# Altium PCB CANDataDiodePCB-STM32F0-J1939-Rev7.PcbDoc
Units mil, origin at the board's own origin, x right, y up, seen from the top; angles counter-clockwise.
Board outline 2229 x 2270 mil, 2 copper layers (Component Side, Bottom Layer), stack 12.8 mil thick; 50 components, 52 nets, 263 pads, 96 vias.
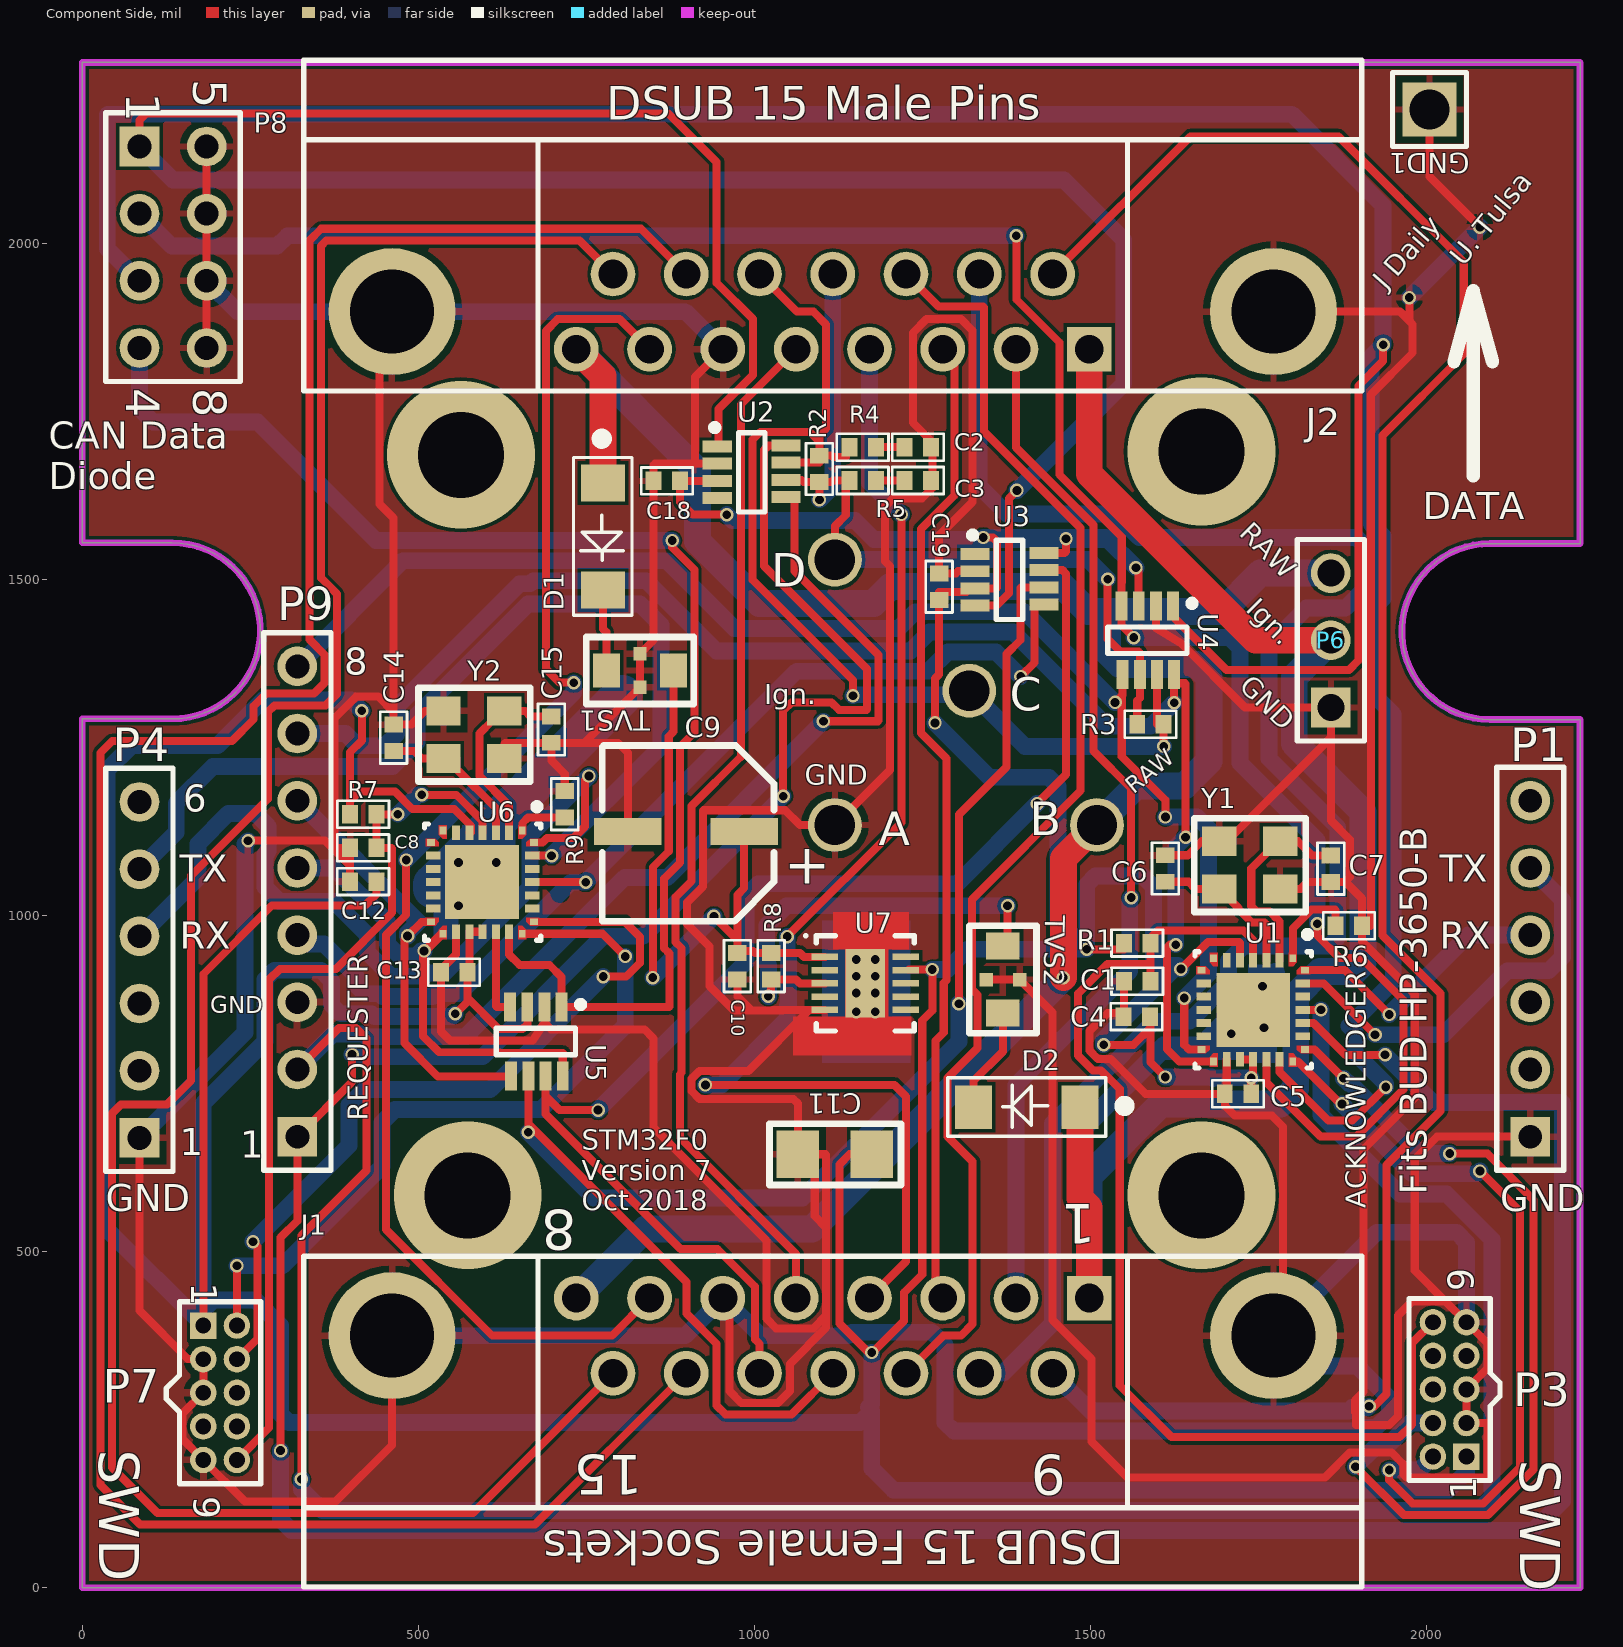
[diagram p0: Component Side view]
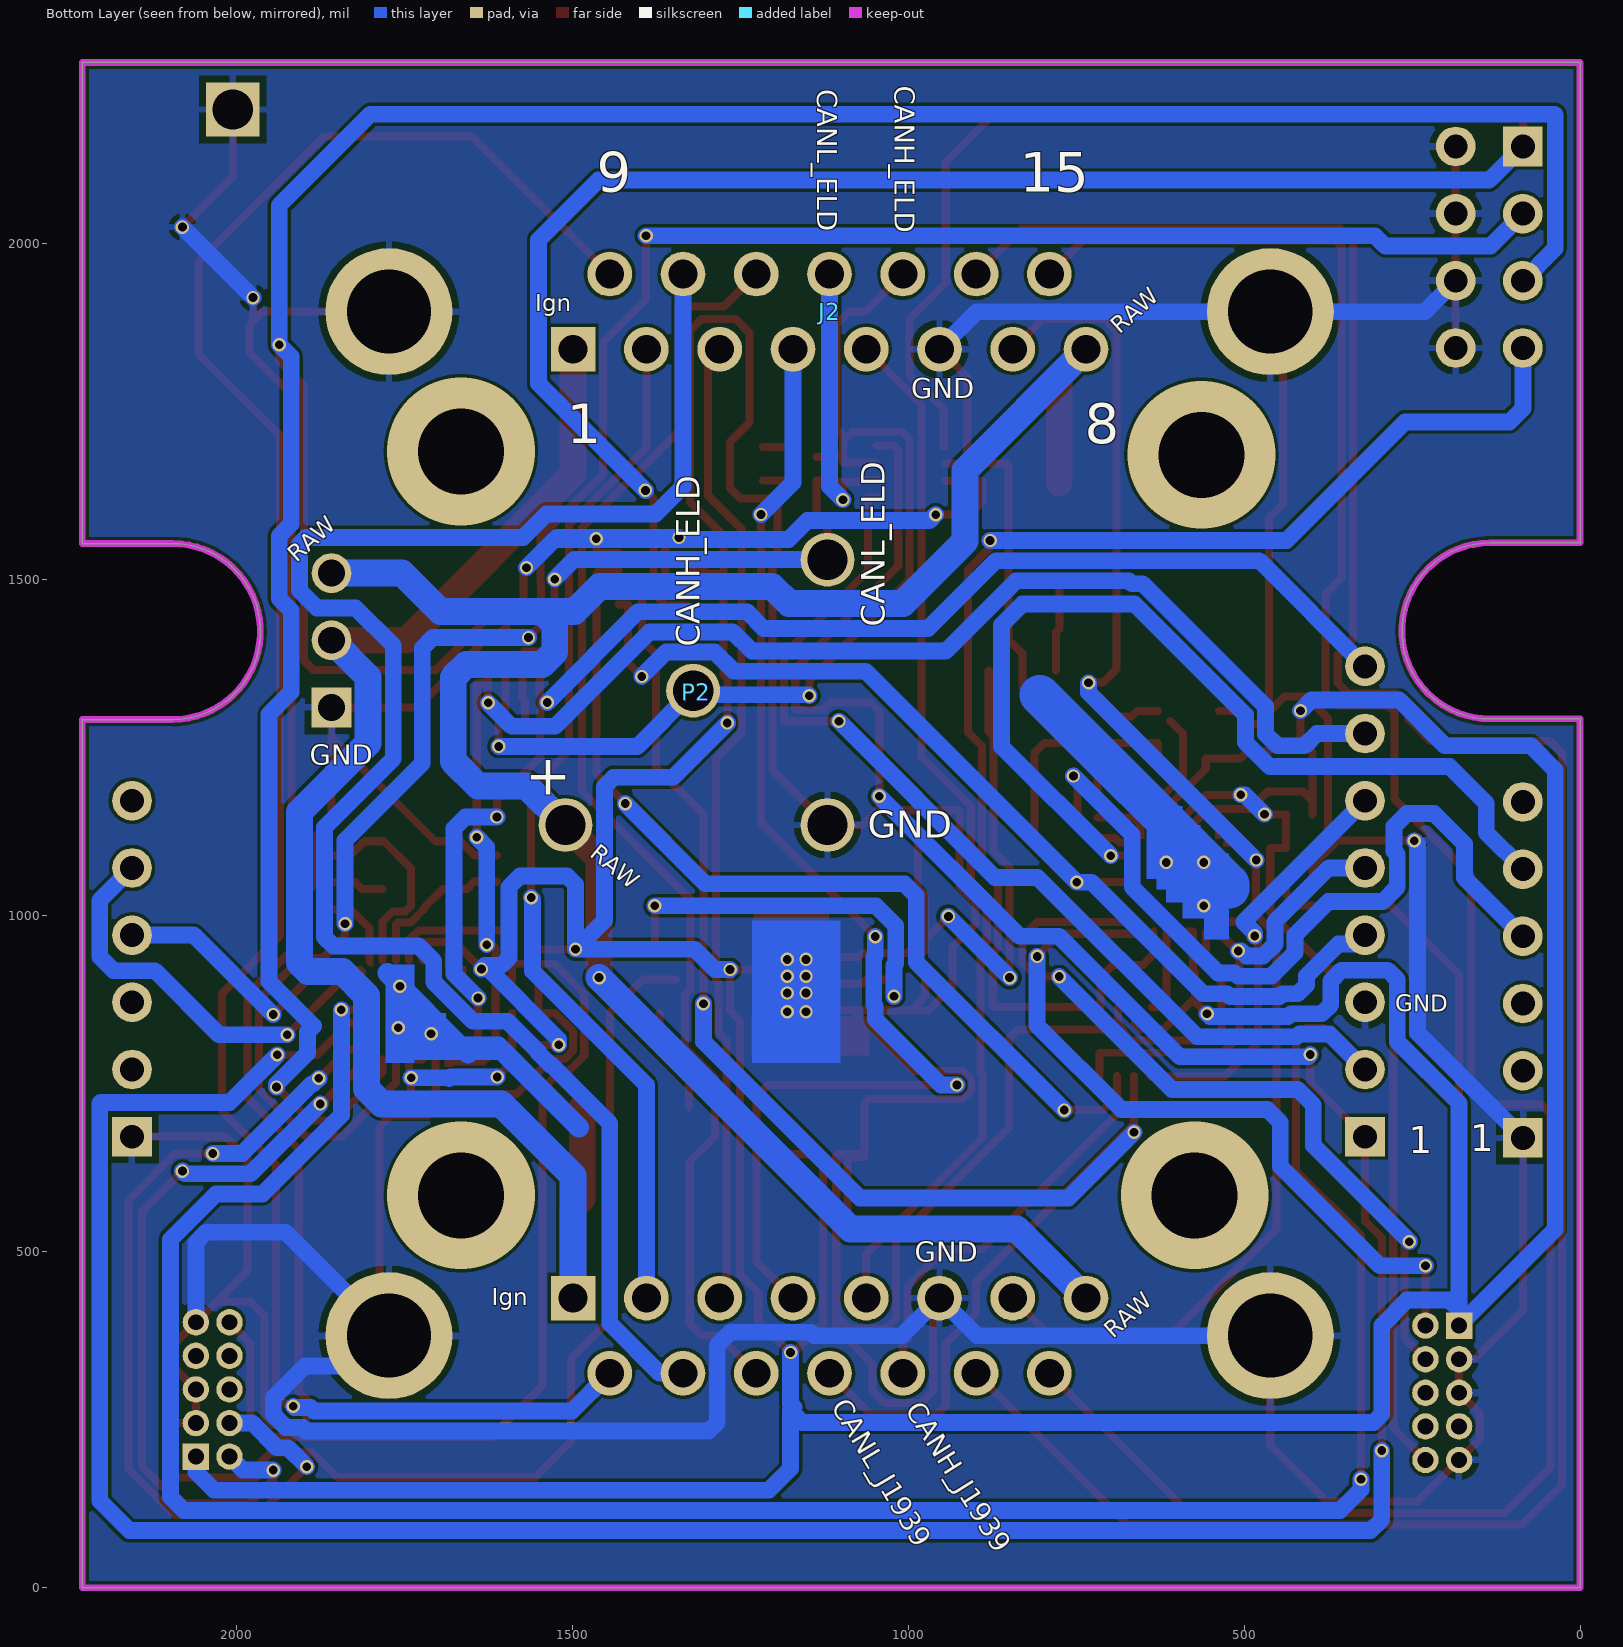
[diagram p1: Bottom Layer view, seen from below]

## Layer stack, top to bottom
Top Solder: solder mask 0.4, Solder Resist, Dk 3.5
Component Side: signal copper 1.4
Dielectric 1: core 10, FR-4, Dk 4.2
Bottom Layer: signal copper 1.4
Solder Side: solder mask 0.4, Solder Resist, Dk 3.5

## Board outline
0,0 0,1293 134,1293 ccw(c134,1424) 134,1555 0,1555 0,2270 2229,2270 2229,1554 2095,1554 ccw(c2095,1423) 2095,1292 2229,1292 2229,0

## Design rules (kind name [scope] priority, off if disabled: settings)
Clearance [All] p1: gap=5 ignorepadtopadclearanceinfootprint=FALSE
HoleSize [All] p1: absolutevalues=TRUE maxlimit=200 minlimit=13 maxpercent=80.000 minpercent=20.000
HoleToHoleClearance [All] p1: gap=10 allowstackedmicrovias=FALSE
MinimumSolderMaskSliver [All] p1: minsoldermaskwidth=1
PolygonConnect [All] p1: connectstyle=Relief reliefconductorwidth=10 reliefentries=4 polygonreliefangle="90 Angle" airgapwidth=10
RoutingVias [All] p1: holewidth=13 width=20 viastyle="Through Hole" minholewidth=13 minwidth=15 maxholewidth=28 maxwidth=50
SMDNeckDown [All] p1: percent=200.000
SilkToSilkClearance [All] p1: silktosilkclearance=1
SilkToSolderMaskClearance [IsPad] p1: minsilkscreentomaskgap=1 clearancetoexposedcopper=TRUE
SolderMaskExpansion [All] p1: expansion=4
Width Large [InNet('RAW') or InNet('Ignition_RAW')] p1: maxlimit=100 minlimit=40 preferedwidth=40 minimp=50.000000 maximp=50.000000 favimp=50.000000
Width [(InComponent('U1')  Or InComponent('U7')) And OnTopLayer] p2: maxlimit=100 minlimit=7 preferedwidth=25 toplayer_prefwidth=12 bottomlayer_minwidth=10 minimp=50.000000 maximp=50.000000 favimp=50.000000
Width Width_1 [All] p3: maxlimit=100 minlimit=7 preferedwidth=25 toplayer_prefwidth=12 bottomlayer_minwidth=10 minimp=50.000000 maximp=50.000000 favimp=50.000000
25 further rules are at their usual default settings.

## Components (designator, comment, footprint, x,y, rotation, side; value= is the part's Value field where it differs from the comment)
C1 "0.1uF" 0402 1570,902.5 r0 top
C2 "560pF" 0402 1243.57,1697.18 r180 top
C3 "560pF" 0402 1243.57,1647.8 r180 top
C4 "0.1uF" 0402 1569.09,850 r0 top
C5 "0.1uF" 0402 1720,735 r0 top
C6 "18pF" 0402 1612.02,1070.31 r270 top
C7 "18pF" 0402 1858.2,1070 r270 top
C8 "0.1uF" 0402 417.98,1100.94 r0 top
C9 "47uF" "Elec. Cap - D" 898.39,1125.59 r0 top
C10 "0.1uF" 0402 975,924.96 r90 top
C11 "22uF" 1206 1120,645 r0 top
C12 "0.1uF" 0402 417.98,1050.94 r0 top
C13 "0.1uF" 0402 553.3,915.94 r0 top
C14 "18pF" 0402 463.14,1265 r270 top
C15 "18pF" 0402 698.14,1277.11 r270 top
C18 "0.1uF" 0402 870,1647.2 r0 top
C19 "0.1uF" 0402 1275,1489.69 r270 top
D1 "ACURA107-HF" "SMA with A and K" 775,1644 r270 top
D2 "ACURA107-HF" "SMA with A and K" 1485,715 r180 top
GND1 "Socket" PIN1 2005,2200 r0 top
J1 "Vehicle Interface Cable Connector (Female)" DSUB1.385-2H15 1116.89,0.98 r180 top
J2 "Device (ELD) Interface Cable Connector (male)" DSUB1.385-2H15 1116.89,2273.11 r180 bottom locked
P1 "Header 6" HDR1X6 2155,671.18 r90 top
P2 "Deutsch 9-pin" HDR1X5 1925,1620 r270 bottom locked
P3 "JTAG/SWD" MHDR2X5 2060,195 r90 top
P4 "Header 6" HDR1X6 85,669.41 r90 top
P6 "Header 3" HDR1X3 1858.2,1310 r90 top
P7 "JTAG/SWD" MHDR2X5 180,390 r270 top
P8 "Saleae Header" HDR2X4_CEN 85,2145 r270 top
P9 "Testpoint Header" HDR1X8 320,671.18 r90 top
R1 "10k" 0402 1570,959.27 r180 top
R2 "120" 0402 1096.97,1665 r90 top
R3 "120" 0402 1589.69,1285 r0 top
R4 "120" 0402 1161.43,1697.18 r0 top
R5 "120" 0402 1161.43,1647.8 r0 top
R6 "10k" 0402 1885.02,985 r180 top
R7 "10k" 0402 417.98,1150.94 r180 top
R8 "120" 0402 1025,924.96 r270 top
R9 "10k" 0402 717.98,1165.94 r270 top
TVS1 "Transfeed Varistor 26V" Transfeed 780,1365 r0 top
TVS2 "Transfeed Varistor 26V" Transfeed 1370,855 r90 top
U1 "STM32F042G4U6" STM-UFQFPN28_V 1742.61,860 r270 top
U2 "TCAN330DCNT" SOT65P280X145-8N 996.18,1660 r0 top
U3 "TCAN330DCNT" SOT65P280X145-8N 1380,1500 r0 top
U4 "TCAN334DCNT" SOT65P280X145-8N 1585,1410 r270 top
U5 "TCAN334DCNT" SOT65P280X145-8N 675,812.89 r270 top
U6 "STM32F042G4U6" STM-UFQFPN28_V 595.74,1050 r270 top
U7 "TLS810B1LDV33XUMA1" SON50P330X110_HS-11N 1165.24,899.37 r0 top
Y1 "20MHz" "XTAL 4 pad" 1692.06,1040 r0 top
Y2 "20MHz" "XTAL 4 pad" 537.59,1234.13 r0 top

## Footprints (in the part's own frame and the unit in brackets; to place one, negate y for a bottom-side part, rotate by r counter-clockwise, add the part's x,y. Pads: shape width x height; smd on the part's side, far side on the other; paste and mask are expansions set on the pad)
0402 [mm] "Chip Capacitor, Body 1.0x0.5mm, IPC High Density"
  rect 0.6x0.7 smd: 1(-0.5,0) 2(0.5,0)
  silkscreen extent -0.97,-0.51 0.97,0.51, body extent -0.55,-0.3 0.55,0.3, height 1.3
1206 [mm]
  rect 1.6x1.8 smd: 1(-1.4,0) 2(1.4,0)
  silkscreen extent -2.47,-1.16 2.5,1.15
DSUB1.385-2H15 [mm] "Connector; D Subminiature; 15 Position; Right Angle; Pitch 1.385 mm"
  rect 1.69x1.69 hole 1.09: 1(-9.695,-10.92)
  round 1.69 hole 1.09: 2(-6.925,-10.92) 3(-4.155,-10.92) 4(-1.385,-10.92) 5(1.385,-10.92) 6(4.155,-10.92) 7(6.925,-10.92) 8(9.695,-10.92) 9(-8.31,-8.08) 10(-5.54,-8.08) 11(-2.77,-8.08) 12(0,-8.08) 13(2.77,-8.08) 14(5.54,-8.08) 15(8.31,-8.08)
  round 4.8 hole 3.18: 16(-16.66,-9.5) 17(16.66,-9.5)
  silkscreen extent -20,-12.5 20,0
"Elec. Cap - D" [mil] "Panasonic Style Electrolytic capacitor, Can size D, 6.3mm diameter"
  rect 100x40 smd: 1(86.61,0) 2(-86.61,0)
  silkscreen extent -125,-134 131,128
HDR1X3 [mm] "Connector; Header; 3 Position"
  rect 1.5x1.5 hole 1.016: 1(0,0)
  round 1.5 hole 1.016: 2(2.54,0) 3(5.08,0)
  silkscreen extent -1.27,-1.27 6.35,1.27
HDR1X5 [mil] "Connector; Header; 5 Position"
  round 80 hole 60: 2(485,415) 3(285,605) 4(90,805) 5(485,805)
HDR1X6 [mm] "Connector; Header; 6 Position"
  rect 1.5x1.5 hole 0.9: 1(0,0)
  round 1.5 hole 0.9: 2(2.54,0) 3(5.08,0) 4(7.62,0) 5(10.16,0) 6(12.7,0)
  silkscreen extent -1.27,-1.27 13.97,1.27
HDR1X8 [mm] "Connector; Header; 8 Position"
  rect 1.5x1.5 hole 0.9: 1(0,0)
  round 1.5 hole 0.9: 2(2.54,0) 3(5.08,0) 4(7.62,0) 5(10.16,0) 6(12.7,0) 7(15.24,0) 8(17.78,0)
  silkscreen extent -1.27,-1.27 19.05,1.27
HDR2X4_CEN [mm] "Connector; Header; 4x2 Position"
  rect 1.5x1.5 hole 0.9: 1(0,0)
  round 1.5 hole 0.9: 2(2.54,0) 3(5.08,0) 4(7.62,0) 5(0,2.54) 6(2.54,2.54) 7(5.08,2.54) 8(7.62,2.54)
  silkscreen extent -1.27,-1.27 8.89,3.81
MHDR2X5 [mm] "Connector; Header; 5x2 Position"
  rect 1x1 hole 0.6: 1(0,0)
  round 1 hole 0.6: 2(0,1.27) 3(1.27,0) 4(1.27,1.27) 5(2.54,0) 6(2.54,1.27) 7(3.81,0) 8(3.81,1.27) 9(5.08,0) 10(5.08,1.27)
  silkscreen extent -0.9,-1.27 5.98,2.17
PIN1 [mil] "Connector; Plug"
  rect 80x80 hole 60: 1(0,0)
  silkscreen extent -55,-55 55,55
"SMA with A and K" [mil] "SMA with outline and Cathode Bar on Pin 2"
  rect 55x65 smd: 1(0,0) 2(159,0)
  silkscreen extent -71,-44 197,43
SON50P330X110_HS-11N [mm] "SON, 10-Leads, Body 3.25x3.30mm, Pitch 0.50mm, Thermal Pad 2.58x1.48mm, IPC Medium Density"
  rect 1x0.25 smd: 1(-1.53,1) 2(-1.53,0.5) 3(-1.53,0) 4(-1.53,-0.5) 5(-1.53,-1) 6(1.53,-1) 7(1.53,-0.5) 8(1.53,0) 9(1.53,0.5) 10(1.53,1)
  rect 1.48x2.58 smd: 11(0,0)
  silkscreen extent -2.3,-1.8 1.85,1.85, body extent -1.7,-1.65 1.7,1.65, height 1.1
SOT65P280X145-8N [mm] "SOT23, 8-Leads, Body 2.90x2.80mm, Pitch 0.65mm, IPC Medium Density"
  rect 1.1x0.45 smd: 1(-1.3,0.975) 2(-1.3,0.325) 3(-1.3,-0.325) 4(-1.3,-0.975) 5(1.3,-0.934) 6(1.3,-0.284) 7(1.3,0.366) 8(1.3,1.016)
  silkscreen extent -1.52,-1.5 0.5,1.81, body extent -1.3,-1.5 1.3,1.5, height 1.45
STM-UFQFPN28_V [mm] "QFN, 28-Leads, Body 4.1x4.1mm, Pitch 0.5mm"
  rect 0.3x0.25 smd: 1(-1.95,1.5) 7(-1.95,-1.5) 15(1.95,-1.5) 21(1.95,1.5)
  rect 0.55x0.3 smd: 2(-1.875,1) 3(-1.875,0.5) 4(-1.875,0) 5(-1.875,-0.5) 6(-1.875,-1) 16(1.875,-1) 17(1.875,-0.5) 18(1.875,0) 19(1.875,0.5) 20(1.875,1)
  rect 0.25x0.3 smd: 8(-1.5,-1.95) 14(1.5,-1.95) 22(1.5,1.95) 28(-1.5,1.95)
  rect 0.3x0.55 smd: 9(-1,-1.875) 10(-0.5,-1.875) 11(0,-1.875) 12(0.5,-1.875) 13(1,-1.875) 23(1,1.875) 24(0.5,1.875) 25(0,1.875) 26(-0.5,1.875) 27(-1,1.875)
  Component Side region: 1.35,2.15 1.35,1.65 1.505,1.65 1.65,1.795 1.65,2.15
  Component Side region: 2.15,-1.35 1.65,-1.35 1.65,-1.505 1.795,-1.65 2.15,-1.65
  Component Side region: -2.15,1.35 -1.65,1.35 -1.65,1.505 -1.795,1.65 -2.15,1.65
  Component Side region: 2.15,1.35 1.65,1.35 1.65,1.505 1.795,1.65 2.15,1.65
  Component Side region: 1.35,-2.15 1.35,-1.65 1.505,-1.65 1.65,-1.795 1.65,-2.15
  Component Side region: -1.35,2.15 -1.35,1.65 -1.505,1.65 -1.65,1.795 -1.65,2.15
  Component Side region: -1.35,-2.15 -1.35,-1.65 -1.505,-1.65 -1.65,-1.795 -1.65,-2.15
  Component Side region: -2.15,-1.35 -1.65,-1.35 -1.65,-1.505 -1.795,-1.65 -2.15,-1.65
  silkscreen extent -2.97,-2.2 2.2,2.2, body extent -2.05,-2.05 2.05,2.05, height 0.6
Transfeed [mil] "AVX Multilayer Ceramic Transient Voltage Suppressors"
  rect 40x50 smd: 1(0,0) 2(100,0)
  rect 20x20 smd: 3(50,-25) 3(50,25)
  silkscreen extent -30,-50 130,50
"XTAL 4 pad" [mm] "16MHz ±30ppm Crystal 18pF 80 Ohms 4-SMD, No Lead XTAL 4 pad ECS Inc.  ECS-160-18-33Q-DS"
  rect 1.3x1.1 smd: 1(0,0) 2(2.3,0) 3(2.3,1.8) 4(0,1.8)
  silkscreen extent -0.95,-0.87 3.27,2.67

## Part data
C1 C4 C5 C8 C10 C12 C13 C18 C19: library part Cap, "0.1µF ±10% 50V Ceramic Capacitor X7R 0402 (1005 Metric)", Manufacturer="TDK Corporation", PartNumber=CGA2B3X7R1H104K050BB, Supplier Part Number 1=445-6899-1-ND, Supplier 1=Digi-Key
C2 C3: library part Cap, "560pF ±5% 50V Ceramic Capacitor CH 0402 (1005 Metric)", Manufacturer="Taiyo Yuden", PartNumber=06031C561K4T2A, Supplier Part Number 1=587-5093-1-ND, Supplier 1=Digi-Key
C6 C7 C14 C15: library part Cap, "18pF ±5% 50V Ceramic Capacitor C0G, NP0 0402 (1005 Metric)", Manufacturer="Murata Electronics North America", PartNumber=GCM1555C1H180JA16D, Supplier Part Number 1=490-12650-1-ND, Supplier 1=Digi-Key
C9: library part "Electrolytic Cap", "47µF 35V Aluminum Capacitors Radial, Can - SMD 5000 Hrs @ 105°C", Manufacturer="Panasonic Electronic Components", PartNumber=EEE-HDV470XAP, Supplier Part Number 1=PCE4968CT-ND, Supplier 1=Digi-Key
C11: library part Cap, "22µF ±20% 4V Ceramic Capacitor X7R 1206 (3216 Metric)", Manufacturer="Taiyo Yuden", PartNumber=AMK316AB7226MLHT, Supplier Part Number 1=587-3267-1-ND, Supplier 1=Digi-Key
D1 D2: library part "Schottky Diode", "Diode Schottky 1000V 1A Surface Mount DO-214AC (SMA)", Manufacturer="Comchip Technology", Supplier Part Number 1=641-1884-1-ND, PartNumber=ACURA107-HF, Supplier 1=Digi-Key
J1: library part "D Connector 15", "Receptacle Assembly, 15 Position, Right Angle", Manufacturer="Amphenol FCI", PartNumber=D15S33E4GV00LF, Supplier Part Number 1=609-1498-ND, Supplier 1=Digi-Key
J2: library part "D Connector 15", "Receptacle Assembly, 15 Position, Right Angle", Manufacturer="Amphenol FCI", PartNumber=D15P33E4GV00LF, Supplier Part Number 1=609-1492-ND, Supplier 1=Digi-Key
P1 P4: "Header, 6-Pin", Manufacturer="Sullins Connector Solutions", PartNumber=PBC06SFAN, Supplier Part Number 1=S1211E-06-ND, Supplier 1=Digi-Key
P2: library part "Header 5", "Pins A,B C, D oin the J1939 connector"
P3: library part MHDR2X5, "Connector Header Through Hole 10 position 0.050\" (1.27mm)", Manufacturer="CNC Tech", PartNumber=1175-1627-ND, Supplier 1=Digi-Key, Supplier Part Number 1=1175-1627-ND
P6: "Header, 3-Pin"
P7: library part MHDR2X5, "Header, 5-Pin, Dual row", Manufacturer="CNC Tech", PartNumber=1175-1627-ND, Supplier 1=Digi-Key, Supplier Part Number 1=1175-1627-ND
P8: library part "Header 4X2A", "Header, 4-Pin, Dual row", LatestRevisionDate=17-Jul-2002, LatestRevisionNote="Re-released for DXP Platform.", Publisher="Altium Limited"
P9: library part "Header 8", "Header, 8-Pin", LatestRevisionDate=17-Jul-2002, LatestRevisionNote="Re-released for DXP Platform.", Publisher="Altium Limited"
R1 R6 R7 R9: library part "Chip Resistor", "10 kOhms ±0.5% 0.063W, 1/16W Chip Resistor 0402 (1005 Metric) Anti-Sulfur, Automotive AEC-Q200 Thin Film", Manufacturer=Susumu, PartNumber=RG1005P-103-D-T10, Supplier Part Number 1=RG10P10.0KDCT-ND, Supplier 1=Digi-Key
R2 R3 R4 R5 R8: library part "Chip Resistor", "120 Ohms ±1% 0.063W, 1/16W Chip Resistor 0402 (1005 Metric) Automotive AEC-Q200 Thick Film", Manufacturer="Vishay Dale", PartNumber=CRCW0402120RFKED, Supplier Part Number 1=541-120LCT-ND, Supplier 1=Digi-Key
TVS1 TVS2: library part Transfeed, "34.5V 80A Varistor 1 Circuit Surface Mount 0805 (2012 Metric)", Manufacturer=AVX, PartNumber=V2AF126C600Y2EDP, Supplier Part Number 1=478-10038-1-ND, Supplier 1=Digi-Key
U1 U6: library part STM32F050G4U6, "ARM® Cortex®-M0 STM32F0 Microcontroller IC 32-Bit 48MHz 16KB (16K x 8) FLASH 28-UFQFPN (4x4)", Manufacturer=STMicroelectronics, Supplier Part Number 1=497-13619-ND, PartNumber=STM32F050G4U6, Supplier 1=Digi-Key
U2 U3: library part SN65HVD234DR, "IC TXRX CAN 3.3V SOT23-8", Manufacturer="Texas Instruments", Supplier Part Number 1=296-44210-1-ND, PartNumber=TCAN330DCNT, Supplier 1=Digi-Key
U4 U5: library part SN65HVD234DR, "IC TXRX CAN 3.3V SOT23-8", Manufacturer="Texas Instruments", Supplier Part Number 1=296-44503-1-ND, PartNumber=TCAN334DCNT, Supplier 1=Digi-Key
U7: library part TLS810B1, "Linear Voltage Regulator IC  1 Output  100mA PG-TSON-10", Manufacturer="Infineon Technologies", Supplier Part Number 1=TLS810B1LDV33XUMA1CT-ND, PartNumber=TLS810B1LDV33XUMA1, Supplier 1=Digi-Key
Y1 Y2: library part "Crystal with Ground", "20MHz ±30ppm Crystal 18pF 60 Ohms 4-SMD, No Lead", Manufacturer="ECS Inc.", PartNumber=ECS-200-18-33Q-DS, Supplier Part Number 1=XC1998CT-ND, Supplier 1=Digi-Key

## Free pads (board coordinates)
  rect 110x110 smd: 0(595,1050) 0(1742.61,860)

## Via types
v1: diameter 20, hole 13, Component Side to Bottom Layer, 92 vias
v2: diameter 220, hole 128, Component Side to Bottom Layer, 4 vias

## Nets (pads, with @x,y where several pads share a name; then routed paths per layer and width w, separated by ;. In a path a pad name is that pad's centre, name@x,y a point inside that pad or via, vN(x,y) a via of type N, cw(c..) or ccw(c..) an arc to the next point about the centre after c; other vN are vias at no path point)
3V3: C4.2 C5.2 C11.2 C12.2 C13.2 C18.2 C19.2 P3.1 P7.1 R1.2 R7.2 U1.5 U1.17 U1.18 U2.3 U3.3 U3.8 U4.3 U5.3 U6.5 U6.17 U6.18 U7.9 | length 10404.4
  Component Side w12: P7.1 180,913 282,1015 420.61,1015 437.67,1032.06 C12.2 ; R7.2 398.3,1171 ; v1(416,1305) 416,1261 398.3,1243.3 398.3,1171 ; v1(555,854) 572.98,871.98 572.98,878.02 ; U6.5 578.74,1123.82 578.74,1133.74 553.47,1159 491.09,1159 465.09,1185 412.3,1185 398.3,1171 ; U6.18 U6.17 576.05,915.94 C13.2 572.98,878.02 ; U5.3 662.2,838.62 655,831.42 619.58,831.42 572.98,878.02 ; U2.3 C18.2 889.69,1615.81 908.5,1597 v1(959,1597) ; C11.2 1142,645 1127,630 1127,393 1170,350 v1(1175,350) 1175,351 1176,350 1223,397 1223,439 1250,466 1250,844 1265,859 1265,915.04 1260.04,920 U7.9@1230.53,920 ; v1(1269,1287) 1269,1353 1275,1359 C19.2 1275,1482 1316,1482 1316,1487.2 U3.3 1360,1487.2 1361.47,1488.68 1361.47,1557 1355.47,1563 v1(1341,1563) ; U3.8 1462,1540 1464,1542 v1(1464,1561) ; v1(1495,950) R1.2@1550.32,950 ; v1(1520,807.94) 1564.63,807.94 1589.69,833 ; v1(1568,1518) 1572.21,1513.79 U4.3 ; C4.2@1589.69,855 1589.69,833 ; v1(1611.69,760) 1589.69,782 1589.69,833 ; v1(1635,920.68) 1669.97,955.65 ; v1@1640,926 1669.65,955.65 1669.97,955.65 ; U1.17 U1.18 1742.61,761.93 v1(1739.69,759) C5.2 ; U1.5 1722.93,959.45 1721.38,961 1675.32,961 1669.97,955.65
  Bottom Layer w25: v1(416,1305) 400,1321 269,1321 201,1253 73,1253 37,1217 37,533 P7.1 180,413 ; v1(555,854) 551,850 434.4,850 430.4,854 384.5,854 371,867.5 371,903 355,919 286,919 272,905 272,813 180,721 180,413 ; v1(959,1597) 967.79,1588.21 1149.79,1588.21 1178,1560 1526,1560 ; v1(1175,350) 1175,273.5 1170,268.5 1175,263.5 ; v1(1265,920) 1287.42,920 1317.42,950 v1(1495,950) ; v1(1269,1287) 1350,1206 1438.5,1206 1452,1192.5 1452,993 v1(1495,950) ; v1(1341,1563) 1523,1563 1525,1561 ; v1(1464,1561) 1525,1561 ; v1(1520,807.94) 1520,816 v1@1629.98,925.98 ; v1(1568,1518) 1526,1560 ; v1(1611.69,760) 1681,760 1683,758 1684,759 v1(1739.69,759) ; v1(1635,920.68) 1635,920.95 v1@1629.98,925.98 ; P3.1 2060,172 2033,145 1207,145 1175,177 1175,263.5 ; 180,413 195,428 257.5,428 295,390.5 295,258.5 307.5,246 1157.5,246 1175,263.5 ; v1(1495,950) 1495,1046.5 1507.5,1059 1577.5,1059 1594,1042.5 1594,937.5 1605.5,926 v1@1630,926 ; 1525,1561 1526,1560
12V0: C9.1 C10.2 R8.1 TVS1.2 U7.1 | length 963.8
  Component Side w12: v1(849,908) 849,1072.23 872.77,1096 872.77,1267 880,1274.23 TVS1.2 ; v1(940,999) 975,964 ; C9.1 985,1041 975,1031 975,964 ; U7.1 1073.81,938.74 1067.91,944.65 R8.1 1000.95,944.65 998,947.6 975,947.6 975,964
  Bottom Layer w25: v1(849,908) v1(940,999)
A7: J1.11 J2.11 | length 1942.5
  Component Side w12: J1.11 1281.85,375 1307.5,375 1325,392.5 1325,634 1287.5,671.5 1287.5,758.5 1332.08,803.08 1332.08,882.36 1324,890.44 1324,1024.44 1485.65,1186.09 1485.65,1576.88 1341.74,1720.79 1341.74,1905.27 1340.15,1906.86 1274.09,1906.86 J2.11
ACK_CAN_RX: P8.2 U1.19 U4.4 | length 3243.3
  Component Side w12: v1(1390,2012) 1390,1917.5 1454,1853.5 1454,1656.61 1547,1563.61 1547,1496.5 1546.61,1496.11 U4.4 1546.61,1432.39 v1(1565,1414) ; U1.19 1762.3,752 1842.8,671.5 1896.2,671.5 1966,741.3 1966,874.63 1903.42,937.21 1871.08,937.21 1838,970.29 v1(1838,988)
  Bottom Layer w25: P8.2 133,1997 290,1997 305,2012 v1(1390,2012) ; v1(1565,1414) 1707.5,1414 1723,1398.5 1723,1227.01 1838,1112.01 v1(1838,988)
ACK_CAN_TX: P8.3 U1.20 U4.1 | length 4663.2
  Component Side w12: U4.1 1623.39,1445.61 1703,1366 1885,1366 1899,1380 1899,1788.5 1936,1825.5 v1(1936,1850) ; U1.20 1781.98,767.5 1854.48,695 1890,695 v1(1940,745)
  Bottom Layer w25: P8.3 37,1993 37,2192 38,2193 1800,2193 1936,2057 v1(1936,1850) 1918.16,1832.16 1918.16,1583.27 1936,1565.43 1936,1471.96 1918.16,1454.11 1918.16,1332.84 1951,1300 1951,902.13 1885,836.13 1894,827.13 1894,795.48 1940,749.48 v1(1940,745)
ACK_NRST: C1.2 P3.10 R1.1 U1.4 | length 1639.3
  Component Side w12: C1.2 1589.69,929 ; U1.4 1742.61,963.8 1728.42,978 1600.69,978 1589.69,967 1589.69,950 1589.69,929 ; P3.10 1979,364 1979,242.5 1960.5,224 1621,224 1544,301 1544,742 1516.06,769.94 1504.26,769.94 1482,792.2 1482,884 1526,928 1589.69,929
ACK_OSC_IN: C7.1 U1.2 Y1.3 | length 309.1
  Component Side w12: U1.2 1781.98,991.36 1766.69,1006.65 1747.85,1006.65 1739.69,1014.81 1739.69,1070.19 1780.37,1110.87 Y1.3 1809,1110.87 1830.18,1089.69 C7.1
ACK_OSC_OUT: C6.2 U1.3 Y1.1 | length 230.8
  Component Side w12: C6.2 1646,1050.63 1656.63,1040 Y1.1 1720.78,1011.28 1720.78,1009.68 1740.81,989.65 1759.65,989.65 1762.3,987 U1.3
ACK_SHDN: P9.8 U1.14 U4.5 | length 2080.4
  Component Side w12: v1(1537,1317.5) 1547,1327.5 ; U4.5 1548.23,1328.73 1547,1327.5 ; v1(1612,1147) 1612,1172 1547,1237 1547,1327.5 ; v1(1640,877.5) 1640,807.94 1647,800.94 U1.14
  Bottom Layer w25: P9.8 477.32,1528.5 869.35,1528.5 970.35,1427.5 1215,1427.5 1240,1452.5 1402,1452.5 v1(1537,1317.5) ; v1(1612,1147) 1659,1147 1676,1130 1676,913.5 v1(1640,877.5)
ACK_STB: P9.7 U1.15 U4.8 | length 2262
  Component Side w12: v1(1625,1317) U4.8@1625,1346 ; U4.8 U4.8@1625,1346 ; v1(1627.21,957) 1619,957 1614,952 1614,801.73 1632.5,783.23 U1.15 ; v1(1642,1117) 1642,1345 1641,1346 U4.8@1625,1346
  Bottom Layer w25: P9.7 391.49,1271.18 409.67,1253 450.43,1253 468,1270.57 468,1311.33 650.67,1494 666.57,1494 671.07,1498.5 839.35,1498.5 943.85,1394 1232.5,1394 1261,1422.5 1385,1422.5 1525.5,1282 1590,1282 v1(1625,1317) ; v1(1627.21,957) 1627.21,1102.21 v1(1642,1117)
ACK_SWCLK: P3.4 U1.22 | length 1299.3
  Component Side w12: U1.22 1834.06,800.94 v1(1877,758) ; v1(1895,180) 1967,108 2092.04,108 2160,175.96 2160,577 2091,646 v1(2035,646)
  Bottom Layer w25: v1(1877,758) 1885,750 1887.24,750 1991.24,646 v1(2035,646) ; v1(1895,180) 1923.2,208.2 1939.21,208.2 1976,245 P3.4
ACK_SWDAT: P3.2 U1.21 | length 1134.7
  Component Side w12: U1.21 1809.1,783.23 1872.33,720 v1(1874.82,720) ; v1(1945,175) 1945,160 1980,125 2085,125 2140,180 2140,560 v1(2080,620)
  Bottom Layer w25: v1(1874.82,720) 1978.82,616 2076,616 v1(2080,620) ; v1(1945,175) 1990,175 P3.2
ACK_USART_RX: P1.4 U1.28 | length 411.9
  Component Side w12: U1.28 1878.94,919.06 v1(1945,853)
  Bottom Layer w25: v1(1945,853) 2063.18,971.18 P1.4
ACK_USART_TX: P1.5 U1.27 | length 618.5
  Component Side w12: U1.27 1847.63,899.37 v1(1924,823)
  Bottom Layer w25: v1(1924,823) 2026,823 2121.21,918.21 2182.5,918.21 2203,938.71 2203,1023.18 P1.5
CAN1H: J1.5 J2.5 | length 1563
  Component Side w12: J1.5 1062.36,496.68 889.38,669.66 889.38,763.93 892,766.54 892,951.63 883,960.63 883,1027.63 906.77,1051.4 906.77,1163.31 980,1236.54 980,1760.83 J2.5
CAN1L: J1.10 J2.10 | length 2637.8
  Bottom Layer w25: J1.10 1370.09,319.09 1444,393 1444,691 1530.94,777.94 1532.43,777.94 1550,795.52 1550,797 1596,843 1647.93,843 1706,901.07 1706,932.66 1728.34,955 1855.5,955 1868.5,968 1868.5,1131.5 1766.17,1233.83 1766.17,1402.03 1822.14,1458 1879.62,1458 1906,1484.38 1906,1553 1896,1563 1573,1563 1538,1598 1376,1598 1335,1639 J2.10
CAN2H: J1.3 J2.3 | length 1466.7
  Component Side w12: J1.3 1270,441.38 1270,814 1282,826 1282,900 1286,904 1286,1234 1248,1272 1248,1575.53 1297.72,1625.24 1297.72,1825.95 J2.3
CAN2H/J1708+: J1.15 J2.15 | length 3370.2
  Component Side w12: J1.15 581.63,111 112,111 44,179 44,705.5 57.5,719 126,719 162,755 162,1060 276,1174 276,1303 286,1313 362,1313 379,1330 379,1479 355,1503 355,1997 363,2005 739.73,2005 J2.15
CAN2L: J1.4 J2.4 | length 1879.6
  Component Side w12: v1(927.38,748.19) 1208.95,748.19 1225.93,731.21 1225.93,485.42 J1.4 ; v1(1049,969) 1219,1139 v1(1219,1597.2)
  Bottom Layer w25: v1(927.38,748.19) 951.19,748.19 1049,846 1049,865.57 1051,867.57 1051,938.45 1049,940.45 v1(1049,969) ; J2.4 1171.42,1644.78 v1(1219,1597.2)
CAN2L/J1708-: J1.14 J2.14 | length 3731
  Component Side w12: J1.14 673.69,94 86,94 27,153 27,1242.5 44.5,1260 222.5,1260 255,1292.5 255,1312 273.65,1330.65 345,1330.65 360.53,1346.18 360.53,1388.47 338,1411 338,2005 355.5,2022.5 831.28,2022.5 J2.14
CANH_ELD: J2.13 P2.3 R2.2 R3.2 R4.1 U2.7 U4.7 | length 1602.8
  Component Side w12: J2.13 1063.84,1899 1088,1899 1107,1880 1107,1725 1096.97,1714.97 1096.97,1705.53 ; U2.7 1096.97,1674.41 R2.2 ; 1136.18,1682.8 1116.89,1682.8 1115,1684.69 R2.2 ; v1(1147,1327.5) 1147,1350.5 997.71,1499.79 997.71,1708.71 1009,1720 1082.5,1720 1096.97,1705.53 ; U4.7 1599.41,1285 R3.2 v1(1609.37,1252) ; R2.2 1096.97,1705.53
  Bottom Layer w25: v1(1147,1327.5) 1148.32,1328.82 1292.5,1328.82 1292.5,1335 P2.3 1403,1252 v1(1609.37,1252)
CANH_J1939: J1.13 U3.7 U5.7 | length 1988.4
  Component Side w12: U5.7 689.41,731.59 ; v1(767.51,710.8) 710.2,710.8 689.41,731.59 ; J1.13 1007.84,362.9 1001.09,369.64 1001.09,447.91 945,504 890.41,504 689.41,705 689.41,731.59 ; v1(1421,1167) 1464,1210 1464,1509 1458.59,1514.41 U3.7
  Bottom Layer w25: v1(767.51,710.8) 988.01,931.3 988.01,1030 1005.51,1047.5 1301.5,1047.5 v1(1421,1167)
CANL_ELD: J2.12 P2.4 R2.1 R3.1 R5.1 U2.6 U4.6 | length 1257.5
  Component Side w12: U2.6 1070,1648.82 1073.5,1645.32 R2.1 ; v1(1096.97,1619) R2.1 ; P2.4 1120,1580 1136.18,1596.18 1136.18,1647.8 1117.48,1647.8 1115,1645.32 R2.1 ; v1(1526,1501) 1526,1412 1545,1393 1571.82,1393 1573.82,1391 U4.6 1573.82,1323.82 1570,1320 R3.1
  Bottom Layer w25: v1(1096.97,1619) 1116.89,1638.92 J2.12 ; P2.4 1497,1530 v1(1526,1501)
CANL_J1939: J1.12 U3.6 U5.6 | length 2349
  Component Side w12: v1(663.82,677.68) 663.82,690.18 ; U5.6 663.82,690.18 ; J1.12 1055.62,257.83 957.5,257.83 944,271.33 944,363 899,408 899,455 663.82,690.18 ; v1(1304.68,869.18) 1304.68,1150.68 1375.5,1221.5 1375.5,1389.6 1396,1410.1 1396,1487.82 1397,1488.82 U3.6
  Bottom Layer w25: v1(663.82,677.68) 761.5,580 1071.83,580 1304.68,812.86 v1(1304.68,869.18)
GND: C1.1 C2.1 C3.1 C4.1 C5.1 C6.1 C7.2 C8.1 C9.2 C10.1 C11.1 C12.1 C13.1 C14.1 C15.2 C18.1 C19.1 GND1.1 J1.6 J1.16 J1.17 J2.6 J2.16 J2.17 P1.1 P2.5 P3.3 P3.5 P3.9 P4.1 P6.1 P7.3 P7.5 P7.9 P8.5 P8.6 P8.7 P8.8 P9.3 R6.1 R9.1 TVS1.3 TVS2.3 U1.16 U2.2 U3.2 U4.2 U5.2 U6.16 U7.5 U7.11 Y1.2 Y1.4 Y2.2 Y2.4 | length 18829.5
  Component Side w12: P4.1 85,412.5 157.5,340 P7.3 180,314 P7.5 149,259 149,221 P7.9 242,128 377,128 460.98,211.98 J1.17 ; P8.8 P8.7 P8.6 P8.5 ; v1(246.71,1111.71) 361,1111.71 398.3,1074.41 ; C12.1 398.3,1074.41 ; J2.17 442,1880.11 442,1613 463.14,1591.86 463.14,1303.27 ; Y2.4 510.31,1305 490,1284.69 C14.1 463.14,1303.27 ; U6.16 556.37,942.55 533.61,919.79 533.61,827.93 547.12,814.42 670.21,814.42 687.79,841 ; Y2.2 628.14,1256 629.56,1257.42 C15.2 ; U5.2 687.79,841 ; R9.1 717.98,1211 698.14,1230.84 C15.2 ; C9.2 812,1125.59 812,1242.5 797.08,1257.42 747.42,1257.42 ; U2.2 913,1672.8 ; J1.6 953.31,408 963,408 963,292.5 980.67,274.83 1035.33,274.83 1053,292.5 1053,333 1107,387 1107,405 ; J2.6 912,1801.88 912,1673.8 913,1672.8 ; C10.1@975,905.35 C10.1 975,880 996,859 ; U7.5 1082.38,860 ; U3.2 1303.43,1512.8 1300,1509.37 C19.1 1275,1566 1324.74,1615.74 1324.74,1870.76 1307.5,1888 1256.5,1888 1236,1867.5 1236,1734 1265,1705 1265,1636.45 1249.39,1620.84 1206.34,1620.84 1194.5,1609 1194.5,1527.63 1202,1520.13 1202,1217 P2.5 1068,1135 1046,1157 924.5,1157 923.77,1156.27 923.77,1043.4 900,1019.63 900,987.63 933.64,953.99 933.64,895.36 970,859 996,859 ; TVS2.3@1345,905 1369,905 1395,905 1444,856 1444,398.5 1502,340.5 1502,217.5 1555.5,164 1849.3,164 1886.3,201 1948.7,201 1966,183.7 1966,168.7 1970.7,164 2090,164 2091,165 2091,244 2090,245 P3.3 P3.5 2091,326 2091,364 P3.9 2029,426 ; C1.1 1550.32,855 1525.5,855 1499,828.5 1499,799.25 1511.3,786.94 1530.56,786.94 1582.5,735 C5.1 ; U4.2 1597.8,1428 1633.5,1407 1730.5,1310 P6.1 1858.2,1265.35 ; C6.1 1645.14,1090 1666.01,1110.87 Y1.4 1703.72,1110.87 1858.2,1265.35 ; U1.16 1703.24,735 C5.1 ; J1.16 1787,375 1787,686 1770.28,702.72 1715.1,702.72 1700.31,717.5 C5.1 ; J2.16 1960.91,1899.09 1975,1885 ; Y1.2 1812.92,1040 1823.23,1050.31 1879,1050.31 ; v1(1975,1920) 1975,1885 ; GND1.1 2005,2100 v1(2080,2025) ; P1.1 2016.18,671.18 1983,638 1983,472 2029,426 ; 398.3,1074.41 C8.1 376,1100.94 375,1101.94 375,1293.7 407.3,1326 440.41,1326 463.14,1303.27 ; 687.79,841 697.79,831 836.5,831 850,817.5 850,685 1018.09,516.91 1018.09,400.41 1032.5,386 1088,386 1107,405 ; C15.2 747.42,1257.42 ; 747.42,1257.42 830,1340 830,1390 850.32,1410.32 850.32,1671.11 852,1672.8 913,1672.8 ; 996,859 1027,859 ; 1027,859 1042.32,859 1043.32,860 ; 1027,859 1028,860 1043.32,860 ; 1043.32,860 1082.38,860 ; C11.1 1064.88,720.41 1058.11,727.19 918.68,727.19 906.38,739.49 906.38,756.88 918.68,769.19 991.57,769.19 1082.38,860 ; C11.1 1106,645 1107,644 1107,536 ; C11.1 1064.88,641 1090,641 1090,553 1107,536 ; 1107,405 1107,536 ; 1858.2,1265.35 1858.2,1141.8 1886.3,1113.7 1886.3,1057.62 1879,1050.31 ; 1879,1050.31 1880,1050.31 1904.7,1025.61 R6.1 ; R6.1 1904.7,961.63 1983,883.33 1983,728.58 1906.93,652.51 1906.93,291.63 1894,278.7 1894,261.3 1896,259.3 1896,242 1945,242 1958,255 1958,405 1979,426 2029,426 ; R6.1 1917,985 1918,986 1918,1776 1980,1838 1980,1880 1975,1885
  Bottom Layer w25: P4.1 242,826.41 242,1107 v1(246.71,1111.71) ; P8.7 230.91,1899.09 J2.17 897.4,1899.09 J2.6 ; J1.17 897.4,375 J1.6 1009.21,375 1140,375 1145,380 1265,380 1284,361 1284,246 1297,233 1896.74,233 1901.94,238.2 1925.63,238.2 1945,257.57 1945,282.43 1897.43,330 1772.8,330 J1.16 1926.8,529 2045,529 2060,514 P3.9 ; v1(1975,1920) v1(2080,2025)
  other v1: 1151.97,857.16 1180,857.16 1151.97,885 1180,885 1151.97,910 1180,910 1151.97,935 1180,935
Ignition: R8.2 TVS2.2 U7.3 | length 653.3
  Component Side w12: v1(1021,880) 1025,884 R8.2 1062,905.27 1067.9,899.37 U7.3 ; TVS2.2 1377,955 v1(1377,1014.75)
  Bottom Layer w25: v1(1021,880) 1021,926.02 1018.5,928.52 1018.5,985.49 1047.76,1014.75 v1(1377,1014.75)
Ignition_RAW: D2.1 J1.1 J2.1 P6.2 | length 2284.5
  Component Side w40: D2.1 1485,579.58 1498.58,566 J1.1 ; J2.1 1498.58,1657.42 1746,1410 P6.2
  Bottom Layer w40: J1.1 1498.58,613 1605.58,720 1783.5,720 1806,742.5 1806,881 1842,917 1893,917 1906,930 1906,1154.47 1803.67,1256.8 1803.67,1355.47 P6.2
J1939_RX: P8.1 U2.1 U3.4 | length 3578.3
  Component Side w12: P8.1 85,2184 95,2194 872,2194 944,2122 944,1942 998,1888 998,1805 947,1754 947,1698.39 U2.1 ; U3.4 1360.61,1461.61 1379,1480 1379,1621 v1(1391,1633)
  Bottom Layer w25: P8.1 135,2095 1461,2095 1550,2006 1550,1792 v1(1391,1633)
LIN: J1.2 J2.2 | length 1554.3
  Component Side w12: J2.2 1389.53,1697.04 1505,1581.57 1505,1245 1561,1189 v1(1561,1027)
  Bottom Layer w25: J1.2 1389.53,748.19 1559,917.66 1559,1025 v1(1561,1027)
NetC2_2: C2.2 R4.2 | length 40.3
  Component Side w12: R4.2@1175.55,1697.8 C2.2@1215.87,1697.8
NetC3_2: C3.2 R5.2 | length 40.6
  Component Side w12: R5.2@1175.55,1647.8 C3.2@1216.18,1647.8
NetD1_2: D1.2 TVS1.1 | length 122.1
  Component Side w12: D1.2 775,1427 780,1422 TVS1.1
NetD2_2: D2.2 TVS2.1 | length 158.2
  Component Side w12: D2.2 1326,754 1370,798 TVS2.1
NetR6_2: R6.2 U1.1 | length 143.1
  Component Side w12: U1.1 1801.67,981.37 1829.3,1009 1864.33,1009 1865.33,1008 R6.2
NetR9_2: R9.2 U6.1 | length 77.6
  Component Side w12: U6.1 654.79,1137.56 663.49,1146.26 R9.2
RAW: D1.1 J1.8 J2.8 P2.2 P6.3 | length 3342.8
  Component Side w40: J2.8 775,1803.39 D1.1 ; v1(1460,908) 1460,1085 P2.2
  Bottom Layer w40: J1.8 838.29,534 1086,534 v1(1460,908) ; J2.8 915.5,1662.89 915.5,1557.35 1007.85,1465 1177.5,1465 1202.5,1490 1459.5,1490 1496.5,1453 1545,1453 ; P2.2 1568.24,1193.24 1640.24,1193.24 1677,1230 1677,1355 1658,1374 1544.5,1374 1526,1392.5 1526,1434 1545,1453 ; P6.3 1753,1510 1696,1453 1545,1453
REQ_CAN_RX: U5.4 U6.19 | length 132.4
  Component Side w12: U6.19 615.42,865.65 617,864.07 U5.4
REQ_CAN_TX: P8.4 U5.1 U6.20 | length 2025
  Component Side w12: U6.20 635.11,942.5 650.61,927 695,927 713.38,908.62 U5.1 873,864.07 874,865.07 874,943.63 866,951.63 866,1055.23 889.77,1079 889.77,1251.77 911,1273 911,1515 878,1548 v1(878,1558.5)
  Bottom Layer w25: P8.4 85,1755 105,1735 260.5,1735 437,1558.5 v1(878,1558.5)
REQ_NRST: C8.2 P7.10 R7.1 U6.4 | length 1331.6
  Component Side w12: P7.10 278,238 278,905 294,921 377.46,921 461,1004.54 461,1099.94 460,1100.94 C8.2 R7.1 v1(469.44,1150.94) ; v1(505,1180) 556.52,1180 595.74,1140.78 U6.4
  Bottom Layer w25: v1(469.44,1150.94) 498.5,1180 v1(505,1180)
REQ_OSC_IN: C15.1 U6.2 Y2.3 | length 266.2
  Component Side w12: Y2.3@610.17,1290.17 591.18,1271.18 591.18,1208.29 634.47,1165 635.11,1165 U6.2 ; Y2.3 659,1305 667.21,1296.79 C15.1
REQ_OSC_OUT: C14.2 U6.3 Y2.1 | length 233
  Component Side w12: C14.2 494,1245.31 505.18,1234.13 Y2.1 557,1234.13 557,1218.43 615.42,1160.01 U6.3
REQ_SHDN: P9.6 U5.5 U6.14 | length 667.6
  Component Side w12: U6.14 505.05,990.94 v1(484.1,970) 479.5,965.4 479.5,810.5 529,761 638.23,761 U5.5
  Bottom Layer w25: P9.6 500.5,990.68 484.1,974.28 v1(484.1,970)
REQ_STB: P9.5 U5.8 U6.15 | length 724.9
  Component Side w12: v1(508.57,947.6) 536.68,975.71 U6.15 507,943.54 507,820.64 530.64,797 715,796 U5.8
  Bottom Layer w25: P9.5 374.06,1071.18 454.1,991.14 454.1,957.57 471.68,940 496.53,940 504.13,947.6 v1(508.57,947.6)
REQ_SWCLK: P7.4 U6.22 | length 1179.2
  Component Side w12: P7.4 261,371 261,508 v1(254,515) ; U6.22 807.5,990.94 829.94,968.5 829.94,930 809.44,909.5 v1(775.15,909.5)
  Bottom Layer w25: v1(254,515) 396.94,657.94 396.94,718.44 420,741.5 607.15,741.5 v1(775.15,909.5)
REQ_SWDAT: P7.2 U6.21 | length 1123.3
  Component Side w12: P7.2 v1(230,479) ; U6.21 774.27,973.23 v1(808,939.5)
  Bottom Layer w25: v1(230,479) 298,479 446,627 446,692.5 465,711.5 682.5,711.5 808,837 v1(808,939.5)
REQ_USART_RX: P4.4 U6.28 | length 1281.7
  Component Side w12: U6.28 685.06,1109.06 691.68,1115.68 731.2,1115.68 748.15,1132.62 748.15,1202.15 v1(754,1208)
  Bottom Layer w25: P4.4 172,1056.41 172,1107 217,1152 257.5,1152 276.74,1132.76 276.74,1096 272,1091.26 272,1042.5 293.5,1021 374.35,1021 424.1,971.25 424.1,945.15 459.25,910 508.95,910 513.95,915 539,915 666.28,1042.28 666.28,1120.28 v1(754,1208)
REQ_USART_TX: P4.5 U6.27 | length 1441.3
  Component Side w12: U6.27 v1(698.37,1089.37)
  Bottom Layer w25: P4.5 139.69,1124.1 139.69,1167.5 194.19,1222 461.85,1222 498,1258.15 498,1298.9 663.1,1464 829.8,1464 861,1432.8 861,1252 v1(698.37,1089.37)
SHDN_ELD: P9.2 U1.25 U2.5 | length 5018.4
  Component Side w12: P9.2 381.82,833 407.5,833 423,817.5 423,621 326,524 v1(326,161.5) ; U2.5 1060,1623.23 1060,1513 1185,1388 1185,1290.5 1184,1289.5 v1(1103,1289.5) ; U1.25 v1(1843.5,860)
  Bottom Layer w25: P9.2 372.82,824 417.97,824 421.97,820 570,820 807.14,1057.14 870.64,1057.14 v1(1103,1289.5) ; v1(326,161.5) 326,146.21 357.21,115 2078,115 2098,135 2098,518.43 2030.43,586 1961,586 1843.5,703.5 v1(1843.5,860)
SHDN_J1939: P9.4 U3.5 U6.25 | length 1613.3
  Component Side w12: U6.25 695,1050 ; v1(1396.5,1356.1) 1417,1376.6 1417,1463.23 U3.5 ; 695,1050 v1(749.2,1050) 695,1050
  Bottom Layer w25: P9.4 333.02,958.16 359.53,958.16 407.18,910.51 407.18,896.82 420,884 442.82,884 446.82,880 521.38,880 525.38,884 561,884 727,1050 v1(749.2,1050) 1063.2,1364 1259.5,1364 1288,1392.5 1360.1,1392.5 v1(1396.5,1356.1)
  other v1: 749.2,1050
SHLD/LIN: J1.7 J2.7 | length 2143.6
  Component Side w12: v1(482,1083) 482,1001.5 452,971.5 452,533.17 610.17,375 788.35,375 J1.7 ; v1(731.37,1346.87) 710.13,1346.87 690,1367 690,1870.5 707.5,1888 799.44,1888 J2.7
  Bottom Layer w25: v1(482,1083) 731.37,1332.37 v1(731.37,1346.87)
SILENT_ELD: P9.1 U1.24 U2.8 | length 5247.5
  Component Side w12: v1(295,204) 295,521 320,546 P9.1 401.5,752.68 v1(401.5,793.5) ; v1(1043,1178) 1043,1305 1055.5,1317.5 1115,1317.5 1126,1306.5 1167,1306.5 1168,1307.5 1168,1367.5 1014.71,1520.79 1014.71,1693 1021.71,1700 U2.8 ; U1.24 1832.5,840.32 1879.82,793 v1(1938.91,793)
  Bottom Layer w25: v1(295,204) 295,101.5 311.5,85 2159,85 2203,129 2203,721 2202,722 2009.91,722 v1(1938.91,793) ; v1(401.5,793.5) 405,790 595.65,790 775.15,969.5 834.5,969.5 v1(1043,1178)
SWCAN: J1.9 J2.9 | length 3109.3
  Component Side w12: J2.9 1649.06,2160 1869.44,2160 2056,1973.44 2056,1835.78 1935,1714.78 1935,970.83 2021.41,884.42 2021.41,709.58 1941,629.17 1941,288 1923,270 v1(1915,270)
  Bottom Layer w25: J1.9 1500.15,263 1884.32,263.01 1889.52,268.2 1913.2,268.2 v1(1915,270)
pads on no net: P1.2 P1.3 P1.6 P3.6 P3.7 P3.8 P4.2 P4.3 P4.6 P7.6 P7.7 P7.8 U1.6 U1.7 U1.8 U1.9 U1.10 U1.11 U1.12 U1.13 U1.23 U1.26 U2.4 U3.1 U6.6 U6.7 U6.8 U6.9 U6.10 U6.11 U6.12 U6.13 U6.23 U6.24 U6.26 U7.2 U7.4 U7.6 U7.7 U7.8 U7.10
copper on no net: | length 789
  Bottom Layer w10: 515.89,1039.11 523.84,1039.11 ; 803.86,1328.64 803.86,1328.82 ; 1639.89,812.28 1676.71,812.28
  Bottom Layer w30: 1490,685 1610,805 ; 1655,795 1775,915
  Bottom Layer w60: 522.28,1040.67 522.28,1047.06 803.86,1328.64
  other v1: 1710,824.38 1758.82,833.38 1756.4,895 560,1014.75 560,1079.43 615.87,1079.43
  other v2: 573.5,584 1665.5,584 563.5,1686 1665.5,1691

## Polygon pours and split planes (outlines as drawn)
GND on Component Side "GND_L01_P010" (solid, remove dead copper, pour order 10): 0,0 0,1293 134,1293 ccw(c134,1424) 134,1555 0,1555 0,2270 2229,2270 2229,1554 2095,1554 ccw(c2095,1423) 2095,1292 2229,1292 2229,0
GND on Bottom Layer "GND_L02_P011" (solid, remove dead copper, pour order 11): 3.23,3.55 3.23,1296.55 137.23,1296.55 ccw(c137.23,1427.55) 137.23,1558.55 3.23,1558.55 3.23,2273.55 2232.23,2273.55 2232.23,1557.55 2098.23,1557.55 ccw(c2098.23,1426.55) 2098.23,1295.55 2232.23,1295.55 2232.23,3.55

## Keep-outs
Keep-Out Layer:
  the board outline again, w10

## Other copper
Component Side:
  rectangle net GND: 1117.48,949.96 1230,1005.38
  rectangle net GND: 1057.35,792.13 1233.96,850.08
  rectangle net GND: 1135,800 1200,1000
Bottom Layer:
  rectangle: 565,1099.61 595.65,1135
  rectangle: 591.55,1103.91 625.87,1163.1
  rectangle: 522.59,965 560,1004.52
  rectangle: 581.55,1020 615.87,1045
  rectangle: 585,1039.11 630,1059
  rectangle: 620,1091.33 645,1188.16
  rectangle: 522.59,995.81 591.55,1092.87
  rectangle: 540,1055 645.07,1105
  rectangle: 1605,785 1745,820
  rectangle: 1688,785 1745,855
  rectangle: 1735,780.88 1777.8,927.34
  rectangle net GND: 1100.96,780.88 1232.5,993
  rectangle net GND: 1135,795 1200,985

## Silkscreen, mask and mechanical layers (free items; w line width, h text height)
Top Overlay:
  lines w20: 2041.43,1824.61 2070,1930 ; 2070,1655 2070,1930 ; 2098.73,1824.65 2070,1930
  text "DSUB 15 Male Pins" at 780,2185 h50
  text "U. Tulsa" at 2055,1965 h30 r50.57
  text "J Daily" at 1940,1930 h30 r48.73
  text "CAN Data / Diode" at -50,1635 h40
  text "DATA" at 1995,1590 h40
  text "RAW" at 1720.1,1568 h30 r315
  text "D" at 1025,1490 h50
  text "Ign." at 1730,1455 h30 r315
  text "8" at 390,1358.82 h40
  text "GND" at 1720,1340 h30 r315
  text "Ign." at 1015,1315 h30
  text "C" at 1380,1305 h50
  text "GND" at 1075,1195 h30
  text "RAW" at 1565,1180 h25 r39.09
  text "6" at 150,1155 h40
  text "B" at 1410,1120 h50
  text "A" at 1185,1105 h50
  text "TX" at 145,1050.63 h40
  text "TX" at 2020,1050.63 h40
  text "RX" at 145,950.63 h40
  text "RX" at 2020,950.63 h40
  text "GND" at 190,855 h25
  text "REQUESTER" at 425,695 h30 r90
  text "1" at 145,643.82 h40
  text "1" at 235,640 h40
  text "Fits BUD HP-3650-B" at 2001,585 h40 r90
  text "ACKNOWLEDGER" at 1910,565 h30 r90
  text "STM32F0 / Version 7 / Oct 2018" at 743.19,561.56 h30
  text "GND" at 35,560 h40
  text "GND" at 2110,560 h40
  text "SWD" at 25,205 h60 r270
  text "SWD" at 2140,190 h60 r270
  text "DSUB 15 Female Sockets" at 1550,85 h50 r180
Bottom Overlay:
  text "CANH_ELD" at 1020,2235 h30 r90
  text "CANL_ELD" at 1135,2230 h30 r90
  text "Ign" at 1555,1900 h25
  text "RAW" at 685,1865 h25 r318.01
  text "GND" at 995,1770 h30
  text "RAW" at 1910,1525 h25 r318.01
  text "CANL_ELD" at 1035,1430 h35 r270
  text "CANH_ELD" at 1310,1400 h35 r270
  text "GND" at 1890.33,1224.69 h30
  text "+" at 1570,1180 h60
  text "GND" at 1060,1115.87 h40
  text "RAW" at 1475,1089.06 h25 r39.09
  text "GND" at 275,857.16 h25
  text "1" at 163.33,649.41 h40
  text "1" at 255,646.5 h40
  text "GND" at 990,485 h30
  text "Ign" at 1620,420 h25
  text "RAW" at 695,370 h25 r318.01
  text "CANL_J1939" at 1115,270 h30 r59.3
  text "CANH_J1939" at 1005,265 h30 r57.83

## Dimensions
50,12.98 to 79.01,508.94 on Mechanical 1
1665.5,1691 to 2229,1554 on Mechanical 1
563.5,1686 to 0,2270 on Mechanical 1
563.5,1686 to 0,2270 on Mechanical 1
563.5,1686 to 573.5,584 on Mechanical 1
563.5,1686 to 1665.5,1691 on Mechanical 1
2229,2270 to 2229,0 on Mechanical 1
1964,1423 to 2229,1554 on Mechanical 1
2229,2270 to 2229,1554 on Mechanical 1
0,2270 to 2229,2270 on Mechanical 1

## Text inside footprints (layer, text, board x,y; h text height)
C9: Top Overlay "+" at 1045,1047.5 h60
J1: Top Overlay "1" at 1508.43,570.87 h59.06 r180; Top Overlay "8" at 735.2,562 h59.06 r180; Top Overlay "15" at 834.02,196.85 h59.06 r180; Top Overlay "9" at 1463.74,196.85 h59.06 r180
J2: Bottom Overlay "9" at 1463.74,2077.24 h59.06; Bottom Overlay "15" at 834.02,2077.24 h59.06; Bottom Overlay "8" at 736.89,1703.23 h59.06; Bottom Overlay "1" at 1508.43,1703.23 h59.06
P3: Top Overlay "9" at 2070.72,441.06 h39.37 r90; Top Overlay "1" at 2074.9,130.92 h39.37 r90
P7: Top Overlay "9" at 165.98,135.79 h39.37 r270; Top Overlay "1" at 162.05,453.61 h39.37 r270
P8: Top Overlay "5" at 165,2245 h50 r270; Top Overlay "1" at 65,2225 h50 r270; Top Overlay "4" at 65,1785 h50 r270; Top Overlay "8" at 165,1785 h50 r270